# Altium PCB WorldClock.PcbDoc (part 13 of 13)
Units mil, origin at the board's own origin, x right, y up, seen from the top; angles counter-clockwise.
Board outline 3700 x 3850 mil, 2 copper layers (Top Layer, Bottom Layer); 227 components, 134 nets, 1324 pads, 248 vias.
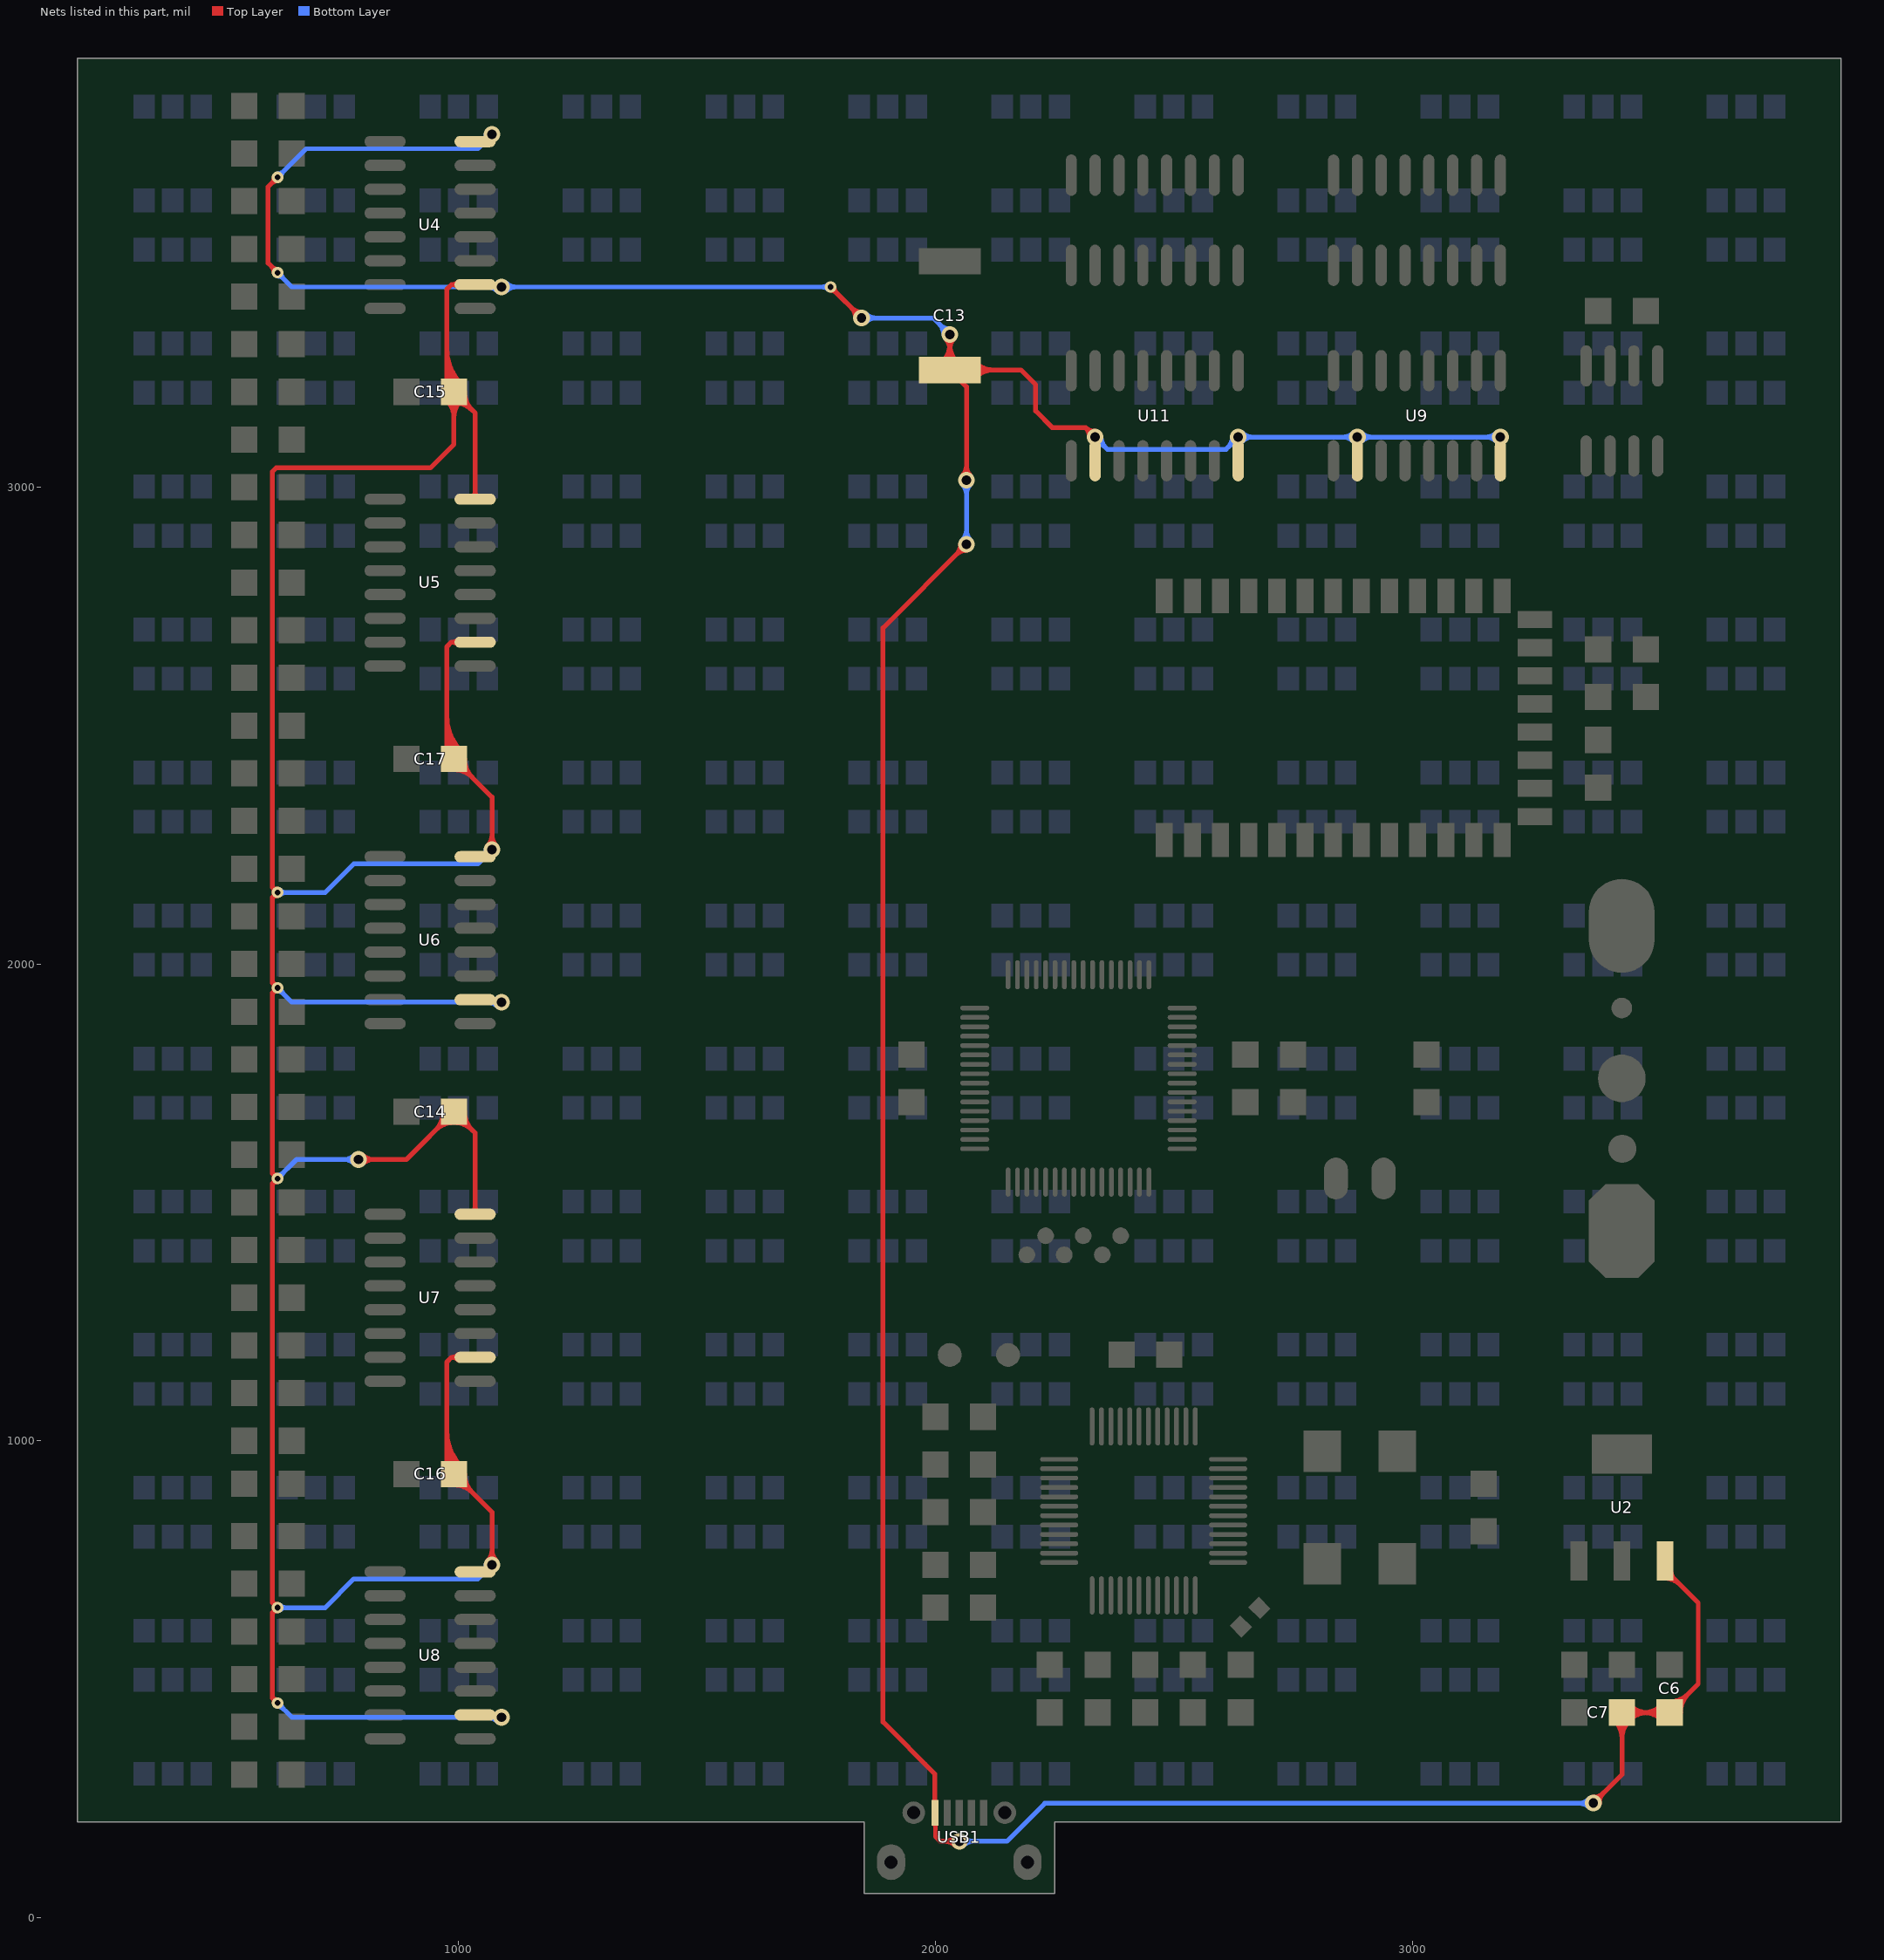
[diagram p13: the nets of this part, all layers, seen from the top]

## Via types
v1: diameter 35, hole 20, Top Layer to Bottom Layer, tented both sides, 213 vias
v2: diameter 24, hole 12, Top Layer to Bottom Layer, tented both sides, 35 vias

## Nets (pads, with @x,y where several pads share a name; then routed paths per layer and width w, separated by ;. In a path a pad name is that pad's centre, name@x,y a point inside that pad or via, vN(x,y) a via of type N, cw(c..) or ccw(c..) an arc to the next point about the centre after c; other vN are vias at no path point) (continued)
VBUS: C6.1 C7.2 C13.1 C14.1 C15.1 C16.1 C17.1 U2.3 U4.10 U4.16 U5.10 U5.16 U6.10 U6.16 U7.10 U7.16 U8.10 U8.16 U9.10 U9.16 U11.10 U11.16 USB1.1 | length 20469.1
  Top Layer w10: v2@613,3450 ccw(c596.1,3450) 608.05,3461.95 ccw(c620,3473.9) v2@620,3457 ; v2@613,3650 cw(c596.1,3650) 608.05,3638.05 cw(c620,3626.1) v2@620,3643 ; v2@613.03,450.67 ccw(c600.84,451.84) 609.5,460.5 ; v2@613.03,649.33 cw(c600.84,648.16) 609.5,639.5 ; v2@613.03,650.67 ccw(c600.84,651.84) 609.5,660.5 ; v2@613.03,1549.33 cw(c600.84,1548.16) 609.5,1539.5 ; v2@613.03,1550.67 ccw(c600.84,1551.84) 609.5,1560.5 ; v2@613.03,1949.33 cw(c600.84,1948.16) 609.5,1939.5 ; v2@613.03,1950.67 ccw(c600.84,1951.84) 609.5,1960.5 ; v2@613.03,2149.33 cw(c600.84,2148.16) 609.5,2139.5 ; v2@613.03,2150.67 ccw(c600.84,2151.84) 609.5,2160.5 ; v2@619.33,456.97 cw(c618.16,469.16) 609.5,460.5 ; v2@619.33,643.03 ccw(c618.16,630.84) 609.5,639.5 ; v2@619.33,656.97 cw(c618.16,669.16) 609.5,660.5 ; v2@619.33,1543.03 ccw(c618.16,1530.84) 609.5,1539.5 ; v2@619.33,1556.97 cw(c618.16,1569.16) 609.5,1560.5 ; v2@619.33,1943.03 ccw(c618.16,1930.84) 609.5,1939.5 ; v2@619.33,1956.97 cw(c618.16,1969.16) 609.5,1960.5 ; v2@619.33,2143.03 ccw(c618.16,2130.84) 609.5,2139.5 ; v2@619.33,2156.97 cw(c618.16,2169.16) 609.5,2160.5 ; v2(620,450) 609.5,460.5 ; v2(620,3450) 600,3470 600,3630 v2(620,3650) ; v1(790,1590) 890,1590 C14.1@990,1690 1034.49,1645.51 U7.16@1034.49,1475 ; v1@798.84,1581.16 cw(c820.18,1559.82) 820.18,1590 cw(c820.18,1620.18) v1@798.84,1598.84 ; C14.1@967.5,1690 cw(c913.18,1690) 951.59,1651.59 cw(c990,1613.18) 990,1667.5 cw(c990,1613.18) 1028.41,1651.59 cw(c1066.82,1690) C14.1@1012.5,1690 ; C15.1@974.09,3184.09 cw(c935.68,3145.68) 990,3145.68 cw(c1044.32,3145.68) C15.1@1005.91,3184.09 ; 975,972.25 ccw(c1032.25,972.25) C16.1@991.77,931.77 ; 975,996.39 ccw(c1056.39,996.39) C16.1@998.84,938.84 ; 975,1020.53 ccw(c1080.53,1020.53) C16.1@1005.91,945.91 ; 975,2472.25 ccw(c1032.25,2472.25) C17.1@991.77,2431.77 ; 975,2496.39 ccw(c1056.39,2496.39) C17.1@998.84,2438.84 ; 975,2520.53 ccw(c1080.53,2520.53) C17.1@1005.91,2445.91 ; 975,3242.25 ccw(c1032.25,3242.25) C15.1@991.77,3201.77 ; 975,3266.39 ccw(c1056.39,3266.39) C15.1@998.84,3208.84 ; 975,3290.53 ccw(c1080.53,3290.53) C15.1@1005.91,3215.91 ; C14.1@977.5,1690 cw(c947.32,1690) 968.66,1668.66 cw(c990,1647.32) 990,1677.5 cw(c990,1647.32) 1011.34,1668.66 cw(c1032.68,1690) C14.1@1002.5,1690 ; C15.1@981.16,3191.16 cw(c959.82,3169.82) 990,3169.82 cw(c1020.18,3169.82) C15.1@998.84,3191.16 ; C16.1@990,907.5 cw(c990,853.18) 1028.41,891.59 cw(c1066.82,930) C16.1@1012.5,930 ; C16.1@990,917.5 cw(c990,887.32) 1011.34,908.66 cw(c1032.68,930) C16.1@1002.5,930 ; C17.1@990,2407.5 cw(c990,2353.18) 1028.41,2391.59 cw(c1066.82,2430) C17.1@1012.5,2430 ; C17.1@990,2417.5 cw(c990,2387.32) 1011.34,2408.66 cw(c1032.68,2430) C17.1@1002.5,2430 ; C15.1@990,3177.5 cw(c990,3123.18) 1028.41,3161.59 cw(c1066.82,3200) C15.1@1012.5,3200 ; C15.1@990,3187.5 cw(c990,3157.32) 1011.34,3178.66 cw(c1032.68,3200) C15.1@1002.5,3200 ; U7.10@998.18,1170.18 ccw(c986.55,1158.56) 986.55,1175 ccw(c986.55,1191.44) U7.10@998.18,1179.82 ; U5.10@998.18,2670.18 ccw(c986.55,2658.56) 986.55,2675 ccw(c986.55,2691.44) U5.10@998.18,2679.82 ; U4.10@998.18,3420.18 ccw(c986.55,3408.56) 986.55,3425 ccw(c986.55,3441.44) U4.10@998.18,3429.82 ; U7.16@1029.67,1479.82 ccw(c1018.05,1491.44) 1034.49,1491.44 ccw(c1050.93,1491.44) U7.16@1039.3,1479.82 ; U5.16@1029.67,2979.82 ccw(c1018.05,2991.44) 1034.49,2991.44 ccw(c1050.93,2991.44) U5.16@1039.3,2979.82 ; U7.10@1034.49,1175 985,1175 975,1165 975,945 C16.1@990,930 1070,850 v1(1070,740) cw(c1061.01,740) U8.16@1063.84,731.46 ; U5.10@1034.49,2675 985,2675 975,2665 975,2445 C17.1@990,2430 1070,2350 v1(1070,2240) cw(c1061.01,2240) U6.16@1063.84,2231.46 ; U5.16@1034.49,2975 1034.49,3155.51 C15.1@990,3200 ; U4.10@1034.49,3425 985,3425 975,3415 975,3215 C15.1@990,3200 ; U8.16@1061.17,729.82 ccw(c1039.85,751.14) v1@1070,751.14 ; v1@1061.16,748.84 ccw(c1039.82,770.18) 1070,770.18 ccw(c1100.18,770.18) v1@1078.84,748.84 ; U6.16@1061.17,2229.82 ccw(c1039.85,2251.14) v1@1070,2251.14 ; v1@1061.16,2248.84 ccw(c1039.82,2270.18) 1070,2270.18 ccw(c1100.18,2270.18) v1@1078.84,2248.84 ; v2@1780,3413 cw(c1780,3396.1) 1791.95,3408.05 cw(c1803.9,3420) v2@1787,3420 ; v2(1780,3420) v1(1845,3355) ; v1@1832.5,3355 ccw(c1802.32,3355) 1823.66,3376.34 ccw(c1845,3397.68) v1@1845,3367.5 ; USB1.1@1997.23,198.73 cw(c1990.55,192.05) 2000,192.05 ; C13.1@2014.05,3261.78 ccw(c1975.54,3300.29) 2030,3300.29 ccw(c2084.46,3300.29) C13.1@2045.95,3261.78 ; C13.1@2021.12,3254.71 ccw(c1999.68,3276.15) 2030,3276.15 ccw(c2060.32,3276.15) C13.1@2038.88,3254.71 ; v1@2021.16,3311.16 cw(c1999.82,3289.82) 2030,3289.82 cw(c2060.18,3289.82) v1@2038.84,3311.16 ; v1(2030,3320) C13.1@2030,3245.83 ; v1@2041.16,151.16 ccw(c2019.82,129.82) 2019.82,160 ccw(c2019.82,190.18) v1@2041.16,168.84 ; v1(2050,160) 2010,160 2000,170 2000,219 USB1.1@1999,220 1999,301 1890,410 1890,2705 v1(2065,2880) ; v1@2052.5,2880 cw(c2022.32,2880) 2043.66,2858.66 cw(c2065,2837.32) v1@2065,2867.5 ; v1@2056.16,3023.84 ccw(c2034.82,3045.18) 2065,3045.18 ccw(c2095.18,3045.18) v1@2073.84,3023.84 ; v1(2065,3015) 2065,3210.83 C13.1@2030,3245.83 ; C13.1@2076.28,3236.95 cw(c2097.72,3215.51) 2097.72,3245.83 cw(c2097.72,3276.15) C13.1@2076.28,3254.71 ; C13.1@2083.35,3229.88 cw(c2121.86,3191.36) 2121.86,3245.83 cw(c2121.86,3300.29) C13.1@2083.35,3261.78 ; v1@2322.51,3105.59 ccw(c2296.79,3106.79) 2315,3125 ; v1@2334.41,3117.49 cw(c2333.21,3143.21) 2315,3125 ; v1(2335,3105) 2315,3125 ; v1(3380,240) 3440,300 C7.2@3440,430 C6.1@3540,430 3600,490 3600,660 3530.55,729.45 U2.3@3530.55,747.8 ; v1@3380,252.5 ccw(c3380,282.68) 3401.34,261.34 ccw(c3422.68,240) v1@3392.5,240 ; C7.2@3424.09,414.09 cw(c3385.68,375.68) 3440,375.68 cw(c3494.32,375.68) 3455.91,414.09 cw(c3494.32,375.68) 3494.32,430 cw(c3494.32,484.32) C7.2@3455.91,445.91 ; C7.2@3431.16,421.16 cw(c3409.82,399.82) 3440,399.82 cw(c3470.18,399.82) 3448.84,421.16 cw(c3470.18,399.82) 3470.18,430 cw(c3470.18,460.18) C7.2@3448.84,438.84 ; C6.1@3524.09,414.09 ccw(c3485.68,375.68) 3485.68,430 ccw(c3485.68,484.32) C6.1@3524.09,445.91 ; U2.3@3530.55,711.46 cw(c3530.55,668.02) 3561.27,698.73 ; C6.1@3531.16,421.16 ccw(c3509.82,399.82) 3509.82,430 ccw(c3509.82,460.18) C6.1@3531.16,438.84 ; C6.1@3540,442.5 ccw(c3540,472.68) 3561.34,451.34 ccw(c3582.68,430) C6.1@3552.5,430 ; C6.1@3540,452.5 ccw(c3540,506.82) 3578.41,468.41 ccw(c3616.82,430) C6.1@3562.5,430 ; U2.3@3543.27,724.17 ccw(c3561.23,724.17) 3548.53,711.47 ; 609.5,460.5 609.5,639.5 ; 609.5,639.5 v2(620,650) 609.5,660.5 ; 609.5,660.5 609.5,1539.5 ; 609.5,1539.5 v2(620,1550) 609.5,1560.5 ; 609.5,1560.5 609.5,1939.5 ; 609.5,1939.5 v2(620,1950) 609.5,1960.5 ; 609.5,1960.5 609.5,2139.5 ; 609.5,2139.5 v2(620,2150) 609.5,2160.5 ; 609.5,2160.5 609.5,3032.88 617.12,3040.5 940.5,3040.5 990,3090 C15.1@990,3200 ; C13.1@2030,3245.83 2179.17,3245.83 2210,3215 2210,3160 2245,3125 2315,3125
  Bottom Layer w10: v2@620,443 cw(c620,426.1) 631.95,438.05 cw(c643.9,450) v2@627,450 ; v2(620,450) 650,420 v1(1090,420) ; v2(620,650) 720,650 780,710 1040,710 v1(1070,740) ; v2(620,1550) 660,1590 v1(790,1590) ; v2@620,1557 ccw(c620,1573.9) 631.95,1561.95 ccw(c643.9,1550) v2@627,1550 ; v2@620,1943 cw(c620,1926.1) 631.95,1938.05 cw(c643.9,1950) v2@627,1950 ; v2(620,1950) 650,1920 v1(1090,1920) ; v2(620,2150) 720,2150 780,2210 1040,2210 v1(1070,2240) ; v2@620,3443 cw(c620,3426.1) 631.95,3438.05 cw(c643.9,3450) v2@627,3450 ; v2(620,3450) 650,3420 v1(1090,3420) v2(1780,3420) ; v2(620,3650) 680,3710 1040,3710 v1(1070,3740) ; v2@620,3657 ccw(c620,3673.9) 631.95,3661.95 ccw(c643.9,3650) v2@627,3650 ; v2@624.95,645.05 cw(c636.9,633.1) 636.9,650 cw(c636.9,666.9) v2@624.95,654.95 ; v2@624.95,2145.05 cw(c636.9,2133.1) 636.9,2150 cw(c636.9,2166.9) v2@624.95,2154.95 ; v1@781.16,1581.16 ccw(c759.82,1559.82) 759.82,1590 ccw(c759.82,1620.18) v1@781.16,1598.84 ; v1@1057.5,740 cw(c1027.32,740) 1048.66,718.66 cw(c1070,697.32) v1@1070,727.5 ; v1@1057.5,2240 cw(c1027.32,2240) 1048.66,2218.66 cw(c1070,2197.32) v1@1070,2227.5 ; v1@1057.5,3740 cw(c1027.32,3740) 1048.66,3718.66 cw(c1070,3697.32) v1@1070,3727.5 ; v1@1081.16,411.16 ccw(c1059.82,389.82) 1059.82,420 ccw(c1059.82,450.18) v1@1081.16,428.84 ; v1@1081.16,1911.16 ccw(c1059.82,1889.82) 1059.82,1920 ccw(c1059.82,1950.18) v1@1081.16,1928.84 ; v1@1081.16,3411.16 ccw(c1059.82,3389.82) 1059.82,3420 ccw(c1059.82,3450.18) v1@1081.16,3428.84 ; v1@1098.84,3411.16 cw(c1120.18,3389.82) 1120.18,3420 cw(c1120.18,3450.18) v1@1098.84,3428.84 ; v2@1775.05,3415.05 ccw(c1763.1,3403.1) 1763.1,3420 ccw(c1763.1,3436.9) v2@1775.05,3424.95 ; v1(1845,3355) 1995,3355 v1(2030,3320) ; v1@1853.84,3346.16 cw(c1875.18,3324.82) 1875.18,3355 cw(c1875.18,3385.18) v1@1853.84,3363.84 ; v1@2017.5,3320 ccw(c1987.32,3320) 2008.66,3341.34 ccw(c2030,3362.68) v1@2030,3332.5 ; v1(2050,160) 2150,160 2229.37,239.37 3379.37,239.37 v1(3380,240) ; v1@2056.16,2888.84 ccw(c2034.82,2910.18) 2065,2910.18 ccw(c2095.18,2910.18) v1@2073.84,2888.84 ; v1@2056.16,3006.16 cw(c2034.82,2984.82) 2065,2984.82 cw(c2095.18,2984.82) v1@2073.84,3006.16 ; v1@2058.84,151.16 cw(c2080.18,129.82) 2080.18,160 cw(c2080.18,190.18) v1@2058.84,168.84 ; v1(2065,2880) v1(2065,3015) ; v1@2335,3092.5 cw(c2335,3062.32) 2356.34,3083.66 cw(c2377.68,3105) v1@2347.5,3105 ; v1(2335,3105) 2360.5,3079.5 2609.5,3079.5 v1(2635,3105) v1(2885,3105) v1(3185,3105) ; v1@2622.5,3105 cw(c2592.32,3105) 2613.66,3083.66 cw(c2635,3062.32) v1@2635,3092.5 ; v1@2643.84,3096.16 cw(c2665.18,3074.82) 2665.18,3105 cw(c2665.18,3135.18) v1@2643.84,3113.84 ; v1@2876.16,3096.16 ccw(c2854.82,3074.82) 2854.82,3105 ccw(c2854.82,3135.18) v1@2876.16,3113.84 ; v1@2893.84,3096.16 cw(c2915.18,3074.82) 2915.18,3105 cw(c2915.18,3135.18) v1@2893.84,3113.84 ; v1@3176.16,3096.16 ccw(c3154.82,3074.82) 3154.82,3105 ccw(c3154.82,3135.18) v1@3176.16,3113.84 ; 3348.3,239.37 ccw(c3348.3,271.7) v1@3371.16,248.84 ; 3351.34,239.37 cw(c3351.34,211.34) v1@3371.16,231.16
pads on no net: BAT1.0 BT1.3 BT1.4 BT1.5 BT1.6 BT1.7 BT1.8 BT1.9 BT1.10 BT1.11 BT1.14 BT1.15 BT1.16 BT1.17 BT1.18 BT1.19 BT1.20 BT1.23 BT1.24 BT1.25 BT1.26 BT1.27 BT1.28 BT1.29 BT1.30 BT1.31 BT1.32 BT1.33 BT1.34 MCU1.2 MCU1.3 MCU1.4 MCU1.6 MCU1.10 MCU1.11 MCU1.12 MCU1.18 MCU1.19 MCU1.21 MCU1.22 MCU1.27 MCU1.29 MCU1.38 MCU1.39 MCU1.40 MCU1.41 MCU1.42 MCU1.43 MCU1.45 MCU1.46 U1.3 U3.2 U3.6 U3.8 U3.9 U3.10 U3.11 U3.22 U3.24 U3.25 U3.26 U3.27 U3.28 U3.29 U3.30 U3.33 U3.34 U3.35 U3.36 U3.37 U3.38 U3.39 U3.40 U3.41 U3.42 U3.43 U3.44 U3.45 U3.50 U3.51 U3.52 U3.53 U3.54 U3.55 U3.56 U3.57 U3.58 U3.59 U3.61 U3.62 U8.4 U8.5 U8.6 U8.7 U9.15 U10.9 U10.15 U10.16 U11.9 U11.15 U12.9 USB1.4 USB1.6
copper on no net: | length 796.3
  Top Layer w10: 2191.73,1390 2191.73,1542.48 ; 2231.1,1430 2231.1,1542.48 ; 2270,1390 2270,1542.01 2270.47,1542.48 ; 2309.84,1542.48 2310,1542.32 2310,1430 ; 2349.21,1390 2349.21,1542.48 2350,1541.69 ; 2388.58,1430 2388.58,1542.48

## Polygon pours and split planes (outlines as drawn)
GND on Top Layer "Top Layer-No Net" (solid, remove dead copper, pour order 6): 2320,960 2330,970 2545,970 2553.9,961.1 2553.9,743.9 2540,730 2340,730 2330,730 2320,740
GND on Top Layer "Top Layer-No Net" (solid, remove dead copper, pour order 2): 2130,1930 2470,1930 2470,1590 2130,1590

## Other copper
Top Layer:
  region net OCK: 2435,2977.5 2460,2950 2410,2950
  region net GND: 2635,3502.5 2610,3530 2660,3530
  region net OCK: 1120,525 1147.5,550 1147.5,500
  region net OCK: 1120,2775 1147.5,2800 1147.5,2750
  region net OCK: 1120,2025 1147.5,2050 1147.5,2000
  region net OCK: 1120,1275 1147.5,1300 1147.5,1250

## Silkscreen, mask and mechanical layers (free items; w line width, h text height)
Top Overlay:
  text "World Clock Rev.A" at 1270,2720 h40
  text "by yitiandelan" at 1270,2650 h40
  text "BC04" at 2220,2610 h40
  text "10/8/2014" at 1270,2570 h40
  text "MicroUSB +5v 500mA" at 1270,2330 h40
  text "bluetooth SSP" at 2220,2330 h40
  text "With JLink RTT" at 1270,2260 h40
  text "CR1220 for RTC" at 3180,1280 h40
Mechanical 1:
  lines w8: 200,200 1850,200 1850,50 2250,50 2250,200 3900,200 3900,3900 200,3900 200,200
  lines w10: -220,260 -200,200 ; -220,3840 -200,3900 ; -210,200 -190,200 ; -210,3900 -190,3900 ; -200,1769.09 -200,200 ; -200,2330.91 -200,3900 ; -180,260 -200,200 ; -180,3840 -200,3900 ; -120,110 -100,50 ; -120,3840 -100,3900 ; -110,50 -90,50 ; -110,3900 -90,3900 ; -100,1694.09 -100,50 ; -100,2255.91 -100,3900 ; -80,110 -100,50 ; -80,3840 -100,3900 ; 200,4290 200,4310 ; 260,4280 200,4300 ; 260,4320 200,4300 ; 1750,-300 1850,-300 ; 1769.09,4300 200,4300 ; 1790,-320 1850,-300 ; 1790,-280 1850,-300 ; 1850,-310 1850,-290 ; 2250,-310 2250,-290 ; 2310,-320 2250,-300 ; 2310,-280 2250,-300 ; 2330.91,4300 3900,4300 ; 2350,-300 2250,-300 ; 3840,4280 3900,4300 ; 3840,4320 3900,4300 ; 3900,4290 3900,4310
  text "3700 (mil)" at 1779.09,4264.01 h60
  text "3700 (mil)" at -164.01,1779.09 h60 r90
  text "3850 (mil)" at -64.01,1704.09 h60 r90
  text "400 (mil)" at 1809.08,-443.96 h60
Mechanical 13:
  lines w8: 0,0 1830,0 1830,180 530,180 180,180 180,3830 180,3920 2530,3920 3920,3920 3920,180 3680,180 2270,180 2270,0 4100,0 4100,4100 0,4100 0,0
  lines w10: 0,4190 0,4210 ; 60,4180 0,4200 ; 60,4220 0,4200 ; 1730,-100 1830,-100 ; 1770,-120 1830,-100 ; 1770,-80 1830,-100 ; 1774.08,4200 0,4200 ; 1830,-110 1830,-90 ; 2270,-110 2270,-90 ; 2325.92,4200 4100,4200 ; 2330,-120 2270,-100 ; 2330,-80 2270,-100 ; 2370,-100 2270,-100 ; 4040,4180 4100,4200 ; 4040,4220 4100,4200 ; 4100,4190 4100,4210 ; 4180,60 4200,0 ; 4180,4040 4200,4100 ; 4190,0 4210,0 ; 4190,4100 4210,4100 ; 4200,1774.08 4200,0 ; 4200,2325.92 4200,4100 ; 4220,60 4200,0 ; 4220,4040 4200,4100 ; 4280,-60 4300,0 ; 4280,260 4300,200 ; 4290,0 4310,0 ; 4290,200 4310,200 ; 4300,-100 4300,0 ; 4300,300 4300,200 ; 4320,-60 4300,0 ; 4320,260 4300,200 ; 4530,-60 4550,0 ; 4530,240 4550,180 ; 4540,0 4560,0 ; 4540,180 4560,180 ; 4550,-100 4550,0 ; 4550,280 4550,180 ; 4570,-60 4550,0 ; 4570,240 4550,180
  text "4100 (mil)" at 1784.08,4164.01 h60
  text "4100 (mil)" at 4235.99,1784.08 h60 r90
  text "200 (mil)" at 4443.96,-140.92 h60 r90
  text "180 (mil)" at 4693.96,-145.93 h60 r90
  text "440 (mil)" at 1809.08,-243.96 h60

## Text inside footprints (layer, text, board x,y; h text height)
Y1: Top Overlay "32.768k" at 2905,1645 h40 r90